# Altium PCB PCB1.pcbdoc (part 3 of 3)
Units mil, origin at the board's own origin, x right, y up, seen from the top; angles counter-clockwise.
Board outline 4471.89 x 4515.94 mil, 4 copper layers (Top Layer, Inner1, Inner2, Bottom Layer); 115 components, 147 nets, 637 pads, 517 vias.
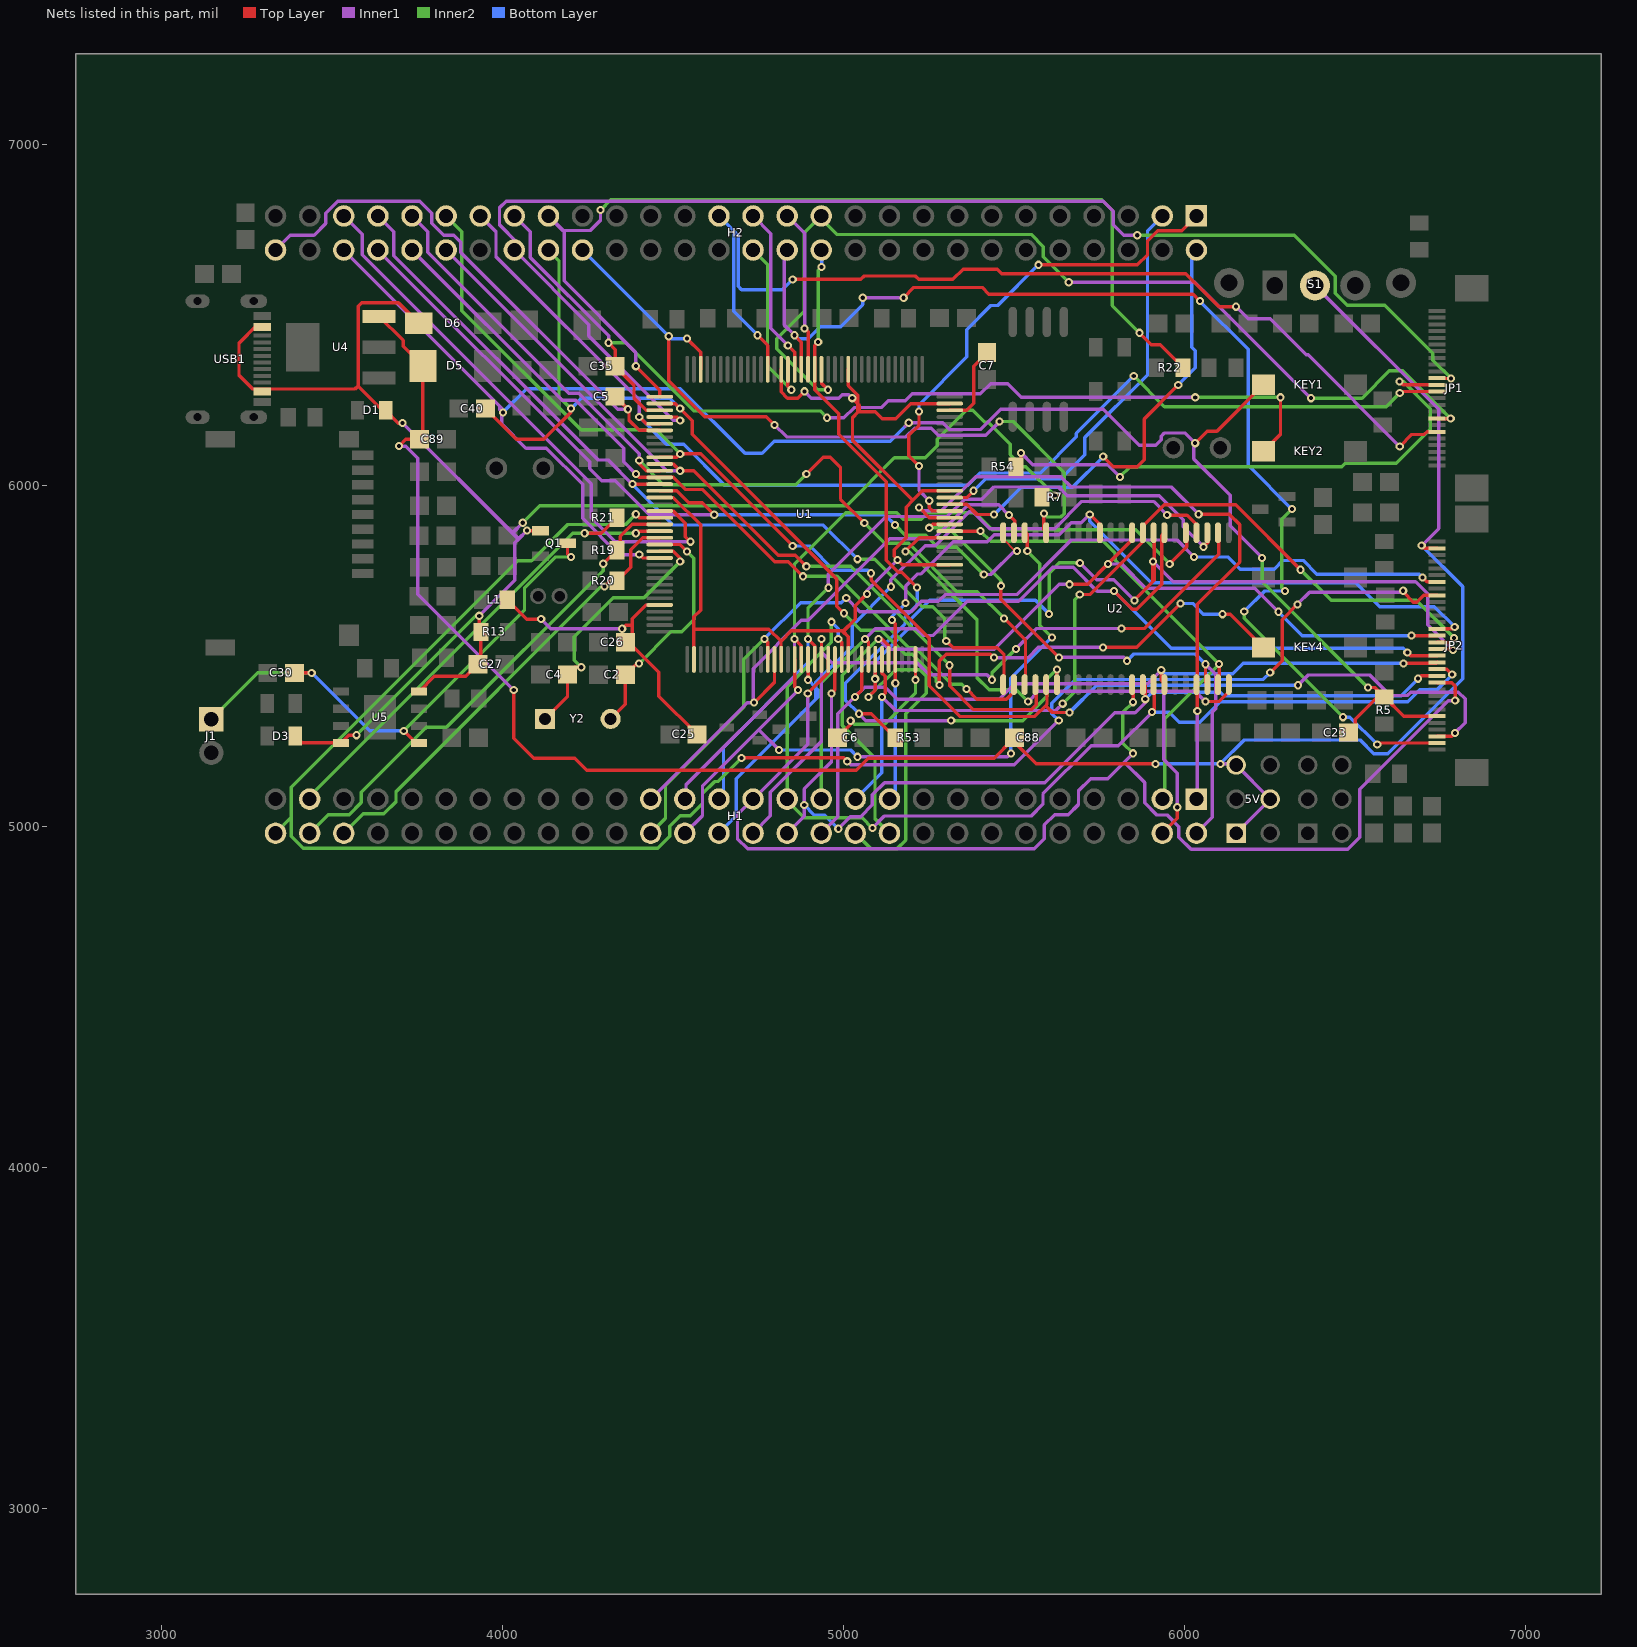
[diagram p5: the nets of this part, all layers, seen from the top]

## Via types
v1: diameter 24.02, hole 12.01, Top Layer to Bottom Layer, 515 vias
v2: diameter 19.68, hole 11.81, Top Layer to Bottom Layer, 2 vias

## Nets (pads, with @x,y where several pads share a name; then routed paths per layer and width w, separated by ;. In a path a pad name is that pad's centre, name@x,y a point inside that pad or via, vN(x,y) a via of type N, cw(c..) or ccw(c..) an arc to the next point about the centre after c; other vN are vias at no path point) (continued)
PE1: H2.38 U1.142 U2.40 | length 2223
  Top Layer w9.92: v1(4488.22,6438.16) 4488.22,6308.16 4594.28,6202.09 4774.28,6202.09 v1(4798.22,6178.16) ; v1(4541.77,6431.14) 4581.77,6391.14 U1.142@4581.77,6341.14 ; v1(5588.22,5918.16) 5588.22,5872.56 U2.40@5597.17,5863.6
  Inner1 w9.92: v1(4798.22,6178.16) 4833.57,6142.81 5183.57,6142.81 5208.93,6168.16 5258.22,6168.16 5278.22,6148.16 5418.22,6148.16 v1(5458.22,6188.16)
  Inner2 w9.92: v1(5458.22,6188.16) 5498.22,6188.16 5648.22,6038.16 5648.22,5918.16 5638.22,5908.16 5598.22,5908.16 v1(5588.22,5918.16)
  Bottom Layer w9.92: H2.38@4235.43,6690.94 4495.23,6431.14 v1(4541.77,6431.14)
PE2: H2.39 R22.2 U1.1 | length 2906.5
  Top Layer w9.92: v1(4391.69,6350.43) 4461.69,6280.43 U1.1@4461.69,6260.43 ; v1(5868.18,6448.2) 5903.54,6412.84 5929.37,6412.84 R22.2@5996.26,6345.94
  Inner1 w9.92: H2.39@4135.43,6790.94 4178.18,6748.2 ; v1(4288.18,6808.2) 4288.18,6778.2 4258.18,6748.2 4178.18,6748.2 ; v1(4391.69,6350.43) 4391.69,6390.43 4181.69,6600.43 4181.69,6744.69 4178.18,6748.2
  Inner2 w9.92: v1(4288.18,6808.2) 4318.18,6838.2 5758.18,6838.2 5788.18,6808.2 5788.18,6528.2 v1(5868.18,6448.2)
PE3: C40.2 H2.40 KEY4.1 U1.2 | length 3557.5
  Top Layer w9.92: C40.2@3951.26,6225.94 4041.26,6135.94 4121.69,6135.94 4201.69,6215.94 v1(4201.69,6225.94) ; U1.2@4461.69,6240.74 4506.89,6240.74 v1(4521.69,6225.94) 4557.05,6190.59 4557.05,6150.59 4981.31,5726.33 4981.31,5646.33 v1(5001.69,5625.94) ; v1(5281.69,5415.94) 5281.69,5485.94 5301.69,5505.94 5431.69,5505.94 v1(5441.69,5495.94) ; v1(5761.69,5525.94) 5860.48,5525.94 v1(5989.12,5654.58) ; v1(6111.69,5623.19) 6134.57,5623.19 KEY4.1@6231.82,5525.94
  Inner1 w9.92: v1(5441.69,5495.94) 5541.69,5495.94 5571.69,5525.94 v1(5761.69,5525.94)
  Inner2 w9.92: v1(5001.69,5625.94) 5051.69,5575.94 5111.69,5575.94 5181.69,5505.94 5201.69,5505.94 5272.4,5435.23 5272.4,5425.23 v1(5281.69,5415.94)
  Inner2 w10: H2.40@4135.43,6690.94 4166.34,6660.04 4166.34,6261.3 v1(4201.69,6225.94)
  Bottom Layer w9.92: v1(4201.69,6225.94) 4231.69,6255.94 4491.69,6255.94 v1(4521.69,6225.94) ; v1(5989.12,5654.58) 6024.6,5654.58 6055.99,5623.19 v1(6111.69,5623.19)
PE4: C35.2 H2.41 KEY2.1 U1.3 | length 3069.6
  Top Layer w9.92: C35.2@4330.76,6350.28 4331.96,6349.08 4386.34,6294.71 4386.34,6256.42 4421.69,6221.06 U1.3@4461.69,6221.06 ; KEY2.1@6231.82,6100.94 6281.96,6151.09 v1(6281.96,6259.08)
  Top Layer w10: v1(4311.96,6419.08) 4331.96,6399.08 C35.2@4331.96,6349.08
  Inner1 w9.92: v1(4951.96,6199.08) 5001.96,6199.08 5031.96,6229.08 5111.96,6229.08 5131.96,6249.08 5181.96,6249.08 5201.96,6269.08 5401.96,6269.08 5431.96,6299.08 5481.96,6299.08 5521.96,6259.08 v1(6031.96,6259.08)
  Inner1 w10: H2.41@4035.43,6790.94 4081.96,6744.41 4081.96,6669.08 4311.96,6439.08 v1(4311.96,6419.08)
  Inner2 w9.92: v1(4311.96,6419.08) 4361.96,6419.08 4561.96,6219.08 4931.96,6219.08 v1(4951.96,6199.08) ; v1(6031.96,6259.08) v1(6281.96,6259.08)
PE5: H2.42 JP1.14 U1.4 | length 4046.9
  Top Layer w9.92: U1.4@4461.69,6201.37 4511.69,6201.37 v1(4521.69,6191.37) ; JP1.14@6741.2,6315.47 6742.27,6314.4 v1(6781.98,6314.4)
  Inner1 w9.92: H2.42@4035.43,6690.94 H2.42@4041.98,6684.4 ; v1(4521.69,6191.37) 4501.69,6191.37 4254.2,6438.86 4254.2,6472.18 H2.42@4041.98,6684.4 ; v1(5861.98,6734.4) 5821.98,6734.4 5791.98,6764.4 5791.98,6804.4 5761.98,6834.4 4011.98,6834.4 3991.98,6814.4 3991.98,6764.4 4041.98,6714.4 H2.42@4041.98,6684.4
  Inner2 w9.92: v1(5861.98,6734.4) 6321.98,6734.4 6441.98,6614.4 6441.98,6564.4 6477.34,6529.04 6587.34,6529.04 6728.76,6387.62 6728.76,6367.62 v1(6781.98,6314.4)
PE6: H2.43 JP1.12 U1.5 | length 3467.1
  Top Layer w9.92: v1(4401.69,6201.69) 4421.69,6181.69 U1.5@4461.69,6181.69 ; v1(6631.69,6271.69) 6636.1,6276.1 JP1.12@6741.2,6276.1
  Inner1 w9.92: H2.43@3935.43,6790.94 3981.69,6744.69 3981.69,6671.69 4401.69,6251.69 v1(4401.69,6201.69)
  Inner2 w9.92: v1(5851.69,6321.69) 5941.69,6231.69 6591.69,6231.69 v1(6631.69,6271.69)
  Bottom Layer w9.92: v1(4401.69,6201.69) 4481.69,6121.69 4531.69,6121.69 4651.69,6001.69 5364.75,6001.69 5400.1,6037.05 5577.05,6037.05 5683.11,6143.12 5683.11,6153.12 v1(5851.69,6321.69)
PE7: H1.27 JP2.11 U1.58 U2.13 | length 3690.1
  Top Layer w9.92: v1(4895.79,5390.74) 4955.79,5450.74 U1.58@4955.79,5490.74 ; U2.13@5849.13,5418.28 5849.69,5417.72 v1(5849.69,5365.2)
  Top Layer w10: JP2.11@6741.2,5422.68 6784.16,5422.68 6794.16,5412.68 v1(6794.16,5369.67)
  Inner1 w9.92: v1(4895.79,5390.74) 4895.79,5241.3 H1.27@4735.43,5080.94 4689.69,5035.2 4689.69,4965.2 4719.69,4935.2 5559.69,4935.2 5589.69,4965.2 5589.69,5005.2 5619.69,5035.2 5659.69,5035.2 5689.69,5065.2 5689.69,5105.2 5725.05,5140.56 5775.05,5140.56 5824.16,5189.67 v1(5849.69,5215.2)
  Inner1 w10: 5824.16,5189.67 5884.16,5129.67 5884.16,5069.67 5919.51,5034.31 5949.51,5034.31 5984.16,4999.67 5984.16,4969.67 6019.51,4934.31 6478.8,4934.31 6514.16,4969.67 6514.16,5109.67 6774.16,5369.67 v1(6794.16,5369.67)
  Inner2 w9.92: v1(5849.69,5215.2) 5819.69,5245.2 5819.69,5335.2 v1(5849.69,5365.2)
PE8: H1.26 JP2.12 U1.59 U2.14 | length 2716.2
  Top Layer w9.92: v1(4965.47,5390.74) 4975.47,5400.74 U1.59@4975.47,5490.74 ; U2.14@5880.63,5418.28 5885.47,5413.44 v1(5885.47,5374.01)
  Top Layer w10: v1(6685.47,5434.01) 6693.82,5442.36 JP2.12@6741.2,5442.36
  Inner1 w9.92: H1.26@4835.43,4980.94 4885.47,5030.98 v1(4885.47,5064.01) 4885.47,5110.74 4965.47,5190.74 v1(4965.47,5390.74) ; v1(4985.47,4994.01) 5020.83,5029.36 5050.83,5029.36 5085.47,5064.01 5085.47,5094.01 5120.83,5129.36 5590.83,5129.36 5795.47,5334.01 5855.47,5334.01 5885.47,5364.01 v1(5885.47,5374.01)
  Bottom Layer w9.92: v1(4885.47,5064.01) 4915.47,5034.01 4945.47,5034.01 v1(4985.47,4994.01)
  Bottom Layer w10: v1(5885.47,5374.01) 5905.47,5394.01 6105.47,5394.01 6115.47,5384.01 6635.47,5384.01 v1(6685.47,5434.01)
PE9: H1.25 JP2.13 U1.60 U2.15 | length 3048.6
  Top Layer w9.92: v1(4985.16,5550.74) 4995.16,5540.74 U1.60@4995.16,5490.74 ; v1(5905.43,5336.09) 5912.13,5342.78 U2.15@5912.13,5418.28
  Top Layer w10: JP2.13@6741.2,5462.05 6769.47,5462.05 v1(6785.43,5446.09)
  Inner1 w9.92: v1(5085.43,4996.09) 5120.79,5031.44 5550.79,5031.44 5585.43,5066.09 5585.43,5096.09 5726.86,5237.51 5806.86,5237.51 v1(5905.43,5336.09)
  Inner2 w9.92: v1(4965.16,5600.74) 4965.16,5540.74 4835.43,5411.02 H1.25@4835.43,5080.94 4835.43,5076.09 4885.43,5026.09 5055.43,5026.09 v1(5085.43,4996.09)
  Bottom Layer w9.92: v1(4965.16,5600.74) 4985.16,5580.74 v1(4985.16,5550.74)
  Bottom Layer w10: v1(5905.43,5336.09) 5955.43,5336.09 5985.43,5306.09 6045.43,5306.09 6105.43,5366.09 6655.43,5366.09 6690.79,5401.44 6740.79,5401.44 v1(6785.43,5446.09)
PE10: H1.24 JP2.14 U1.63 U2.16 | length 2390.7
  Top Layer w9.92: v1(5034.21,5380.74) 5054.21,5400.74 U1.63@5054.21,5490.74 ; v1(5932.46,5458.99) 5932.46,5429.45 U2.16@5943.62,5418.28
  Top Layer w10: v1(6642.46,5478.99) 6738.46,5478.99 JP2.14@6741.2,5481.73
  Inner1 w9.92: H1.24@4935.43,4980.94 4984.21,5029.72 4984.21,5330.74 v1(5034.21,5380.74) 5062.46,5408.99 5122.46,5408.99 5157.81,5373.64 5457.81,5373.64 5503.17,5418.99 5892.46,5418.99 v1(5932.46,5458.99)
  Bottom Layer w10: v1(5932.46,5458.99) 5942.46,5448.99 6142.46,5448.99 6172.46,5478.99 v1(6642.46,5478.99)
PE11: H1.23 JP2.15 U1.64 U2.29 | length 2824.4
  Top Layer w9.92: v1(5063.9,5550.74) 5073.9,5540.74 U1.64@5073.9,5490.74 ; v1(5793.9,5690.74) 5846.83,5637.82 5860.97,5637.82 5933.9,5710.74 5933.9,5853.88 U2.29@5943.62,5863.6
  Top Layer w10: v1(6653.9,5510.74) 6663.23,5501.42 JP2.15@6741.2,5501.42
  Inner1 w9.92: v1(5063.9,5550.74) 5093.9,5580.74 5213.9,5580.74 5233.9,5560.74 5263.9,5560.74 5363.9,5660.74 5513.9,5660.74 5613.9,5760.74 5673.9,5760.74 5743.9,5690.74 v1(5793.9,5690.74)
  Inner2 w9.92: H1.23@4935.43,5080.94 4935.43,5422.28 v1(5063.9,5550.74)
  Bottom Layer w10: v1(5793.9,5690.74) 5961.69,5522.95 6641.69,5522.95 v1(6653.9,5510.74)
PE12: H1.22 JP2.16 U1.65 U2.30 | length 3476
  Top Layer w9.92: v1(5073.58,5380.74) 5093.58,5400.74 v1(5093.58,5433.7) U1.65@5093.58,5490.74 ; v1(5853.58,5663.7) 5907.95,5718.07 5912.13,5722.25 U2.30@5912.13,5863.6
  Top Layer w10: 5907.95,5718.07 v1(5907.95,5778.07) ; JP2.16@6741.2,5521.1 6784.92,5521.1 v1(6787.95,5518.07)
  Inner1 w9.92: v1(5693.58,5773.7) 5743.58,5723.7 5793.58,5723.7 v1(5853.58,5663.7)
  Inner1 w10: v1(5907.95,5778.07) 5967.95,5718.07 6677.95,5718.07 6713.31,5682.71 6713.31,5592.71 v1(6787.95,5518.07)
  Inner2 w9.92: H1.22@5035.43,4980.94 5081.7,4934.68 5157.32,4934.68 5183.58,4960.94 5183.58,5330.74 5243.58,5390.74 5243.58,5440.74 5223.58,5460.74 5153.58,5460.74 v1(5073.58,5380.74) ; v1(5603.58,5623.7) 5603.58,5743.7 5633.58,5773.7 v1(5693.58,5773.7)
  Bottom Layer w9.92: v1(5093.58,5433.7) 5093.58,5483.7 5199.65,5589.76 5199.65,5609.76 5253.58,5663.7 5563.58,5663.7 v1(5603.58,5623.7)
PE13: H1.21 JP2.17 U1.66 U2.31 | length 2795.1
  Top Layer w9.92: v1(5113.27,5380.74) 5123.27,5390.74 5123.27,5440.74 5113.27,5450.74 U1.66@5113.27,5490.74 ; v1(5693.27,5680.74) 5723.27,5680.74 5880.63,5838.1 U2.31@5880.63,5863.6
  Top Layer w10: U2.31@5880.63,5863.6 5880.63,5883.6 5940.63,5943.6 6150.63,5943.6 v1(6340.63,5753.6) ; JP2.17@6741.2,5540.79 6777.82,5540.79 v1(6790.63,5553.6)
  Inner1 w9.92: v1(5113.27,5380.74) 5153.27,5340.74 5623.27,5340.74 v1(5643.27,5360.74)
  Inner2 w9.92: v1(5643.27,5360.74) 5678.63,5396.1 5678.63,5666.1 v1(5693.27,5680.74)
  Inner2 w10: v1(6340.63,5753.6) 6430.63,5663.6 6680.63,5663.6 v1(6790.63,5553.6)
  Bottom Layer w9.92: H1.21@5035.43,5080.94 5113.27,5158.78 v1(5113.27,5380.74)
PE14: H1.20 JP2.18 U1.67 U2.32 | length 2713.9
  Top Layer w9.92: v1(5102.95,5550.74) 5112.95,5550.74 5132.95,5530.74 U1.67@5132.95,5490.74 ; v1(5662.95,5710.74) 5716.27,5710.74 v1(5775.9,5770.38) 5849.13,5843.6 U2.32@5849.13,5863.6
  Top Layer w10: v1(6665.9,5560.38) JP2.18@6741.11,5560.38
  Inner1 w9.92: v1(5102.95,5550.74) 5132.95,5520.74 5442.95,5520.74 5632.95,5710.74 v1(5662.95,5710.74)
  Inner1 w10: v1(5775.9,5770.38) 5815.9,5770.38 5886.61,5699.67 6206.61,5699.67 v1(6275.9,5630.38)
  Inner2 w9.92: v1(5102.95,5550.74) 4996.89,5444.68 4996.89,5296.81 5092.95,5200.74 5092.95,5023.43 H1.20@5135.43,4980.94
  Bottom Layer w10: v1(6275.9,5630.38) 6345.9,5560.38 v1(6665.9,5560.38)
PE15: H1.19 JP2.19 U1.68 U2.35 | length 2617.3
  Top Layer w9.92: v1(5142.64,5605.78) 5152.64,5595.78 U1.68@5152.64,5490.74 v1(5152.64,5420.74) ; v1(5722.64,5915.78) 5754.65,5883.77 U2.35@5754.65,5863.6
  Top Layer w10: JP2.19@6741.2,5580.16 6787.02,5580.16 v1(6792.64,5585.78)
  Inner1 w9.92: v1(5182.64,5655.78) 5182.64,5705.78 5218,5741.14 5228,5741.14 5322.64,5835.78 5422.64,5835.78 5442.64,5855.78 5632.64,5855.78 5668,5891.14 5698,5891.14 v1(5722.64,5915.78)
  Bottom Layer w9.92: H1.19@5135.43,5080.94 5152.64,5098.15 v1(5152.64,5420.74) ; v1(5142.64,5605.78) 5142.64,5615.78 v1(5182.64,5655.78)
  Bottom Layer w10: v1(5722.64,5915.78) 5722.64,5895.78 5902.64,5715.78 6502.64,5715.78 6573.35,5645.07 6733.35,5645.07 v1(6792.64,5585.78)
PF0: H2.45 JP2.3 U1.10 U2.5 | length 4226.9
  Top Layer w9.92: U1.10@4461.69,6083.26 4511.69,6083.26 v1(4521.69,6093.26) 4581.69,6093.26 v1(4851.69,5823.26) ; v1(5081.69,5743.26) 5081.69,5723.26 5251.69,5553.26 5251.69,5413.26 5341.69,5323.26 5561.69,5323.26 5593.26,5354.84 5597.17,5358.74 U2.5@5597.17,5418.28
  Top Layer w10: 5593.26,5354.84 5613.26,5334.84 v1(5663.26,5334.84) ; JP2.3@6741.2,5265.2 6783.63,5265.2 v1(6793.26,5274.84)
  Inner1 w10: v1(6333.26,5414.84) 6363.26,5444.84 6543.26,5444.84 6603.26,5384.84 6653.26,5384.84 6663.26,5394.84 6803.26,5394.84 6823.26,5374.84 6823.26,5304.84 v1(6793.26,5274.84)
  Inner2 w9.92: H2.45@3835.43,6790.94 3881.69,6744.69 3881.69,6513.26 4230.98,6163.98 4450.98,6163.98 v1(4521.69,6093.26)
  Bottom Layer w9.92: v1(4851.69,5823.26) 4901.69,5823.26 4972.4,5752.55 5072.4,5752.55 v1(5081.69,5743.26)
  Bottom Layer w10: v1(5663.26,5334.84) 5743.26,5414.84 v1(6333.26,5414.84)
PF1: H2.46 U1.11 U2.4 | length 2458.3
  Top Layer w9.92: U1.11@4461.69,6063.58 4501.69,6063.58 v1(4521.69,6043.58) 4561.69,6043.58 4809.18,5796.1 4859.18,5796.1 v1(4891.69,5763.58) ; v1(5311.69,5473.58) 5311.69,5413.58 5381.69,5343.58 5551.69,5343.58 5565.67,5357.56 U2.4@5565.67,5418.28
  Inner1 w9.92: H2.46@3835.43,6690.94 4482.79,6043.58 v1(4521.69,6043.58)
  Inner2 w9.92: v1(4891.69,5763.58) 5021.69,5763.58 v1(5311.69,5473.58)
PF2: H2.47 U1.12 U2.3 | length 2690.5
  Top Layer w9.92: v1(4401.69,6073.89) 4401.69,6063.89 4421.69,6043.89 U1.12@4461.69,6043.89 ; v1(4891.69,6033.89) 4941.69,6083.89 4961.69,6083.89 4991.69,6053.89 4991.69,5960.76 v1(5061.69,5890.76) ; v1(5471.69,5610.76) 5534.17,5548.28 U2.3@5534.17,5418.28
  Inner1 w9.92: H2.47@3735.43,6790.94 3781.69,6744.69 3781.69,6683.89 4194.91,6270.67 4224.91,6270.67 4401.69,6093.89 v1(4401.69,6073.89)
  Inner2 w9.92: v1(4401.69,6073.89) 4472.4,6003.18 4860.98,6003.18 v1(4891.69,6033.89) ; v1(5061.69,5890.76) 5121.69,5830.76 5191.69,5830.76 5333.11,5689.34 5393.11,5689.34 v1(5471.69,5610.76)
PF3: H2.48 U1.13 U2.2 | length 2366.1
  Top Layer w9.92: v1(4392.16,6034.21) 4402.16,6024.21 U1.13@4461.69,6024.21 4501.69,6024.21 4537.05,5988.86 4587.05,5988.86 4799.18,5776.73 4839.18,5776.73 v1(4881.69,5734.21) ; v1(5361.69,5404.21) 5391.69,5374.21 5478.61,5374.21 5502.68,5398.28 U2.2@5502.68,5418.28
  Inner1 w9.92: H2.48@3735.43,6690.94 4175.39,6250.99 4215.39,6250.99 4356.81,6109.57 4356.81,6069.57 v1(4392.16,6034.21)
  Inner2 w9.92: v1(4881.69,5734.21) 4981.69,5734.21 5191.69,5524.21 5211.69,5524.21 5317.76,5418.15 5347.76,5418.15 v1(5361.69,5404.21)
PF4: H2.49 U1.14 U2.1 | length 2611.2
  Top Layer w9.92: v1(4381.85,6004.52) U1.14@4461.69,6004.52 ; v1(5301.85,5544.52) 5321.85,5524.52 5451.85,5524.52 5471.18,5505.2 U2.1@5471.18,5418.28
  Inner1 w9.92: H2.49@3635.43,6790.94 3681.85,6744.52 3681.85,6674.52 4281.14,6075.24 4311.14,6075.24 v1(4381.85,6004.52)
  Inner2 w9.92: v1(5041.85,5784.52) 5091.85,5784.52 5231.85,5644.52 5261.85,5644.52 5297.21,5609.17 5297.21,5549.17 v1(5301.85,5544.52)
  Bottom Layer w9.92: v1(4381.85,6004.52) 4501.85,5884.52 4941.85,5884.52 v1(5041.85,5784.52)
PF5: H2.50 U1.15 U2.44 | length 2570.7
  Top Layer w5.91: U2.44@5468.9,5862.07 5468.9,5844.13 5504.84,5808.19 v1(5509.56,5808.19)
  Top Layer w9.92: U1.15@4461.69,5984.84 4511.69,5984.84 4547.05,5949.49 4587.05,5949.49 v1(4621.69,5914.84)
  Inner1 w9.92: H2.50@3635.43,6690.94 4256.34,6070.04 4256.34,6050.2 4291.69,6014.84 4331.69,6014.84 4431.69,5914.84 v1(4621.69,5914.84) ; v1(5412.15,5739.56) 5432.34,5739.56 5500.97,5808.19 v1(5509.56,5808.19)
  Inner2 w9.92: v1(5151.69,5884.84) 5181.69,5854.84 5241.69,5854.84 5277.05,5819.49 5332.23,5819.49 v1(5412.15,5739.56)
  Bottom Layer w9.92: v1(4621.69,5914.84) 5121.69,5914.84 v1(5151.69,5884.84)
PF6: H2.51 U1.18 | length 1655.7
  Top Layer w9.92: U1.18@4461.69,5925.78 4501.69,5925.78 4537.05,5890.43 4537.05,5850.43 v1(4551.69,5835.78)
  Inner1 w9.92: H2.51@3535.43,6790.94 3589.23,6737.15 3589.23,6676.72 4260.98,6004.97 4260.98,5906.5 4331.69,5835.78 v1(4551.69,5835.78)
PF7: H1.56 JP2.24 U1.19 | length 5515.8
  Top Layer w9.92: v1(4391.69,5916.1) 4401.69,5906.1 U1.19@4461.69,5906.1 ; v1(4701.69,5201.77) 5001.69,5201.77 v1(5011.69,5191.77) ; v1(6251.69,5451.77) 6287.05,5487.13 6287.05,5607.13 v1(6331.69,5651.77) ; v1(6641.69,5691.77) 6641.69,5688.58 6671.69,5658.58 6681.69,5658.58 6701.69,5678.58 JP2.24@6741.2,5678.58
  Inner1 w9.92: v1(5011.69,5191.77) 5021.69,5181.77 5501.69,5181.77 v1(5631.69,5311.77) ; v1(6331.69,5651.77) 6367.05,5687.13 6637.05,5687.13 v1(6641.69,5691.77)
  Inner2 w9.92: H1.56@3335.43,4980.94 3381.69,5027.2 ; v1(4391.69,5916.1) 4361.69,5886.1 4191.97,5886.1 4085.91,5780.04 4045.62,5780.04 3381.69,5116.1 3381.69,5027.2 ; v1(4701.69,5201.77) 4632.4,5132.48 4622.4,5132.48 4587.05,5097.13 4587.05,5067.13 4551.69,5031.77 4521.69,5031.77 4491.69,5001.77 4491.69,4971.77 4456.34,4936.42 3417.05,4936.42 3381.69,4971.77 3381.69,5027.2
  Bottom Layer w9.92: v1(5631.69,5311.77) 5611.69,5331.77 5611.69,5361.77 5681.69,5431.77 6231.69,5431.77 v1(6251.69,5451.77)
PF8: H1.54 R19.2 U1.20 | length 1448.2
  Top Layer w9.92: R19.2@4336.26,5810.94 4346.38,5821.06 4346.38,5851.06 4381.73,5886.41 U1.20@4461.69,5886.41
  Top Layer w10: v1(4296.26,5770.94) R19.2@4336.26,5810.94
  Inner2 w10: H1.54@3435.43,4980.94 3490.08,5035.59 3550.91,5035.59 3586.26,5070.94 3586.26,5100.94 3776.64,5291.33 3836.64,5291.33 4296.26,5750.94 v1(4296.26,5770.94)
PF9: H1.53 R21.2 U1.21 | length 1469.7
  Top Layer w9.92: v1(4241.69,5860.51) 4290.83,5860.51 R21.2@4336.26,5905.94 ; v1(4391.69,5860.51) 4397.91,5866.73 U1.21@4461.69,5866.73
  Inner2 w9.92: v1@4242.87,5860.51 v1(4391.69,5860.51)
  Inner2 w10: H1.53@3435.43,5080.94 3435.43,5088.74 4207.21,5860.51 v1(4241.69,5860.51) v1@4242.87,5860.51
PF10: H1.52 R20.2 U1.22 | length 1336.8
  Top Layer w9.92: R20.2@4336.26,5720.94 4339.5,5724.19 4376.34,5761.02 4376.34,5811.69 4411.69,5847.04 U1.22@4461.69,5847.04
  Top Layer w10: v1(4299.5,5704.19) 4319.5,5724.19 R20.2@4339.5,5724.19
  Inner2 w10: H1.52@3535.43,4980.94 3592.28,5037.79 3653.11,5037.79 3688.46,5073.15 3688.46,5103.15 4289.5,5704.19 v1(4299.5,5704.19)
PF11: H1.34 JP2.26 U1.49 | length 2969.7
  Top Layer w9.92: v1(4768.62,5550.74) 4778.62,5540.74 U1.49@4778.62,5490.74 ; v1(6698.62,5730.74) 6711.42,5717.95 JP2.26@6741.2,5717.95
  Inner1 w9.92: v1(5008.62,5670.74) 5048.62,5630.74 5198.62,5630.74 5228.62,5660.74 5278.62,5660.74 5298.62,5680.74 5508.62,5680.74 5668.62,5840.74 5978.62,5840.74 v1(6028.62,5790.74)
  Inner2 w9.92: H1.34@4435.43,4980.94 4478.62,5024.13 4478.62,5120.74 4708.62,5350.74 4708.62,5490.74 v1(4768.62,5550.74)
  Bottom Layer w9.92: v1(4768.62,5550.74) 4874.69,5656.81 4994.69,5656.81 v1(5008.62,5670.74) ; v1(6028.62,5790.74) 6128.62,5790.74 6163.98,5755.39 6263.98,5755.39 6289.33,5780.74 6348.62,5780.74 6388.62,5740.74 6688.62,5740.74 v1(6698.62,5730.74)
PF12: H1.33 U1.50 U2.43 | length 1690.3
  Top Layer w9.92: v1(4738.31,5363.82) 4798.31,5423.82 U1.50@4798.31,5490.74 ; v1(5485.83,5913.82) 5502.68,5896.97 U2.43@5502.68,5863.6
  Inner1 w9.92: H1.33@4435.43,5080.94 4718.31,5363.82 v1@4735.83,5363.82 ; v1(4738.31,5363.82) v1@4735.83,5363.82 ; v1(5485.83,5913.82) 5455.83,5943.82 5365.83,5943.82 5265.83,5843.82 5135.83,5843.82 4897.25,5605.24 4877.25,5605.24 4735.83,5463.82 v1@4735.83,5363.82
PF13: H1.32 U1.53 U2.42 | length 2159.1
  Top Layer w9.92: U1.53@4857.36,5490.74 4857.36,5410.74 v1(4867.36,5400.74) ; U2.42@5534.17,5863.6 5539.57,5858.21 v1(5539.57,5808.19)
  Inner1 w9.92: H1.32@4535.43,4980.94 4587.36,5032.87 4587.36,5120.74 4751.6,5284.99 ; v1(4811.6,5224.99) 4751.6,5284.99 ; v1(4867.36,5400.74) 4751.6,5284.99 ; v1(5041.6,5204.99) 5481.6,5204.99 v1(5491.6,5214.99)
  Inner2 w9.92: v1(5539.57,5808.19) 5576.25,5771.51 5576.25,5590.34 v1(5611.6,5554.99)
  Bottom Layer w9.92: v1(4811.6,5224.99) 5021.6,5224.99 v1(5041.6,5204.99) ; v1(5491.6,5214.99) 5491.6,5434.99 v1(5611.6,5554.99)
PF14: H1.31 U1.54 U2.27 | length 2245.5
  Top Layer w9.92: v1(4857.05,5550.74) 4877.05,5530.74 U1.54@4877.05,5490.74 ; v1(5957.05,5770.74) 6006.61,5820.3 U2.27@6006.61,5863.6
  Inner1 w9.92: H1.31@4535.43,5080.94 4538.85,5084.36 4538.85,5122.55 4857.05,5440.74 v1(4857.05,5550.74)
  Inner2 w9.92: v1(4857.05,5550.74) 4857.05,5770.74 5007.05,5920.74 5157.05,5920.74 5177.05,5900.74 5227.05,5900.74 5247.05,5920.74 5387.05,5920.74 5437.05,5870.74 5857.05,5870.74 v1(5957.05,5770.74)
PF15: H1.30 U1.55 U2.26 | length 2168.1
  Top Layer w9.92: v1(4896.73,5430.74) U1.55@4896.73,5490.74 ; v1(5949.72,5913.73) 6007.99,5913.73 6038.11,5883.6 U2.26@6038.11,5863.6
  Inner1 w9.92: v1(5139.72,5703.73) 5139.72,5723.73 5239.72,5823.73 5269.72,5823.73 5369.72,5923.73 5379.72,5923.73 5429.72,5873.73 5619.72,5873.73 5699.72,5953.73 5909.72,5953.73 v1(5949.72,5913.73)
  Bottom Layer w9.92: H1.30@4635.43,4980.94 4686.73,5032.24 4686.73,5140.74 4919.72,5373.73 ; v1(4896.73,5430.74) 4919.72,5407.76 ; v1(5139.72,5703.73) 5025.78,5589.8 5025.78,5529.8 4919.72,5423.73 4919.72,5407.76 ; 4919.72,5373.73 4919.72,5407.76 ; 4919.72,5373.73 4926.73,5380.74 4926.73,5400.74 4919.72,5407.76
PG0: H1.29 U1.56 U2.25 | length 2199.5
  Top Layer w9.92: v1(4896.42,5550.74) 4916.42,5530.74 U1.56@4916.42,5490.74 ; v1(6056.42,5820.74) 6069.61,5833.93 U2.25@6069.61,5863.6
  Inner1 w9.92: v1(4956.42,5700.74) 4956.42,5740.74 5125.41,5909.73 5305.41,5909.73 5356.42,5960.74 5406.42,5960.74 5441.78,5996.1 5631.07,5996.1 5656.42,5970.74 5926.42,5970.74 5997.13,5900.03 5997.13,5880.03 v1(6056.42,5820.74)
  Inner2 w9.92: v1(4896.42,5550.74) 4896.42,5640.74 v1(4956.42,5700.74)
  Bottom Layer w9.92: H1.29@4635.43,5080.94 4648.93,5094.44 4648.93,5233.26 4896.42,5480.74 v1(4896.42,5550.74)
PG1: H1.28 U1.57 U2.24 | length 2139.8
  Top Layer w9.92: U1.57@4936.1,5490.74 v1(4936.1,5550.74) ; v1(5816.1,5581.06) 5883.14,5581.06 6101.1,5799.02 U2.24@6101.1,5863.6
  Inner1 w9.92: H1.28@4735.43,4980.94 4786.1,5031.61 4786.1,5100.74 4936.1,5250.74 4936.1,5511.06 ; v1(4936.1,5550.74) 4936.1,5511.06 ; v1(5436.1,5431.06) 5421.46,5445.7 5251.46,5445.7 5216.1,5481.06 4966.1,5481.06 4936.1,5511.06 ; v1(5506.1,5521.06) 5566.1,5581.06 v1(5816.1,5581.06)
  Inner2 w9.92: v1(5436.1,5431.06) 5436.1,5451.06 v1(5506.1,5521.06)
PG2: H1.4 U1.87 U2.22 | length 1887.5
  Top Layer w9.92: v1(5182.09,5807.04) 5222.09,5847.04 U1.87@5312.09,5847.04 ; v1(6062.09,5367.04) 6101.36,5367.04 6132.6,5398.28 U2.22@6132.6,5418.28
  Top Layer w10: H1.4@5935.43,4980.94 5979.19,5024.7 v1(5979.19,5057.04)
  Inner1 w9.92: v1(5542.09,5367.04) 5572.09,5397.04 5939.19,5397.04 6032.09,5397.04 v1(6062.09,5367.04)
  Inner1 w10: 5939.19,5397.04 5939.19,5197.04 5979.19,5157.04 v1(5979.19,5057.04)
  Inner2 w9.92: v1(5182.09,5807.04) 5192.09,5807.04 5392.09,5607.04 5392.09,5437.04 5427.45,5401.69 5507.45,5401.69 v1(5542.09,5367.04)
PG3: H1.3 U1.88 U2.21 | length 1486.9
  Top Layer w9.92: U1.88@5312.09,5866.73 v1(5402.09,5866.73) ; U2.21@6101.1,5418.28 6102.09,5419.27 v1(6102.09,5476.73)
  Inner2 w9.92: v1(5402.09,5866.73) 5432.09,5836.73 5762.09,5836.73 5797.45,5801.38 5797.45,5781.38 v1(6102.09,5476.73)
  Inner2 w10: H1.3@5935.43,5080.94 5942.09,5087.6 5942.09,5316.73 v1(6102.09,5476.73)
PG4: H1.2 U1.89 U2.20 | length 1681.6
  Top Layer w9.92: v1(5252.09,5876.41) 5262.09,5886.41 U1.89@5312.09,5886.41 ; v1(5462.09,5706.41) 5462.09,5666.41 v1(5632.09,5496.41) ; v1(6062.09,5476.41) 6062.09,5425.8 U2.20@6069.61,5418.28
  Inner1 w9.92: v1(5632.09,5496.41) 5822.09,5496.41 v1(5832.09,5486.41)
  Inner1 w10: H1.2@6035.43,4980.94 6082.09,5027.6 6082.09,5336.41 6092.09,5346.41 6092.09,5446.41 v1(6062.09,5476.41)
  Inner2 w9.92: v1(5252.09,5876.41) 5307.76,5876.41 5462.09,5722.09 v1(5462.09,5706.41)
  Bottom Layer w9.92: v1(5832.09,5486.41) 5852.09,5506.41 6032.09,5506.41 v1(6062.09,5476.41)
PG5: H1.1 U1.90 U2.19 | length 2003.6
  Top Layer w9.92: v1(5222.09,5936.1) 5252.09,5906.1 U1.90@5312.09,5906.1 ; U2.19@6038.11,5418.97 6038.11,5652.12 6162.09,5776.1 6162.09,5886.1 6132.09,5916.1 v1(6042.09,5916.1)
  Top Layer w10: v1(6038.11,5338.97) 6038.11,5418.28 U2.19@6038.11,5418.97
  Inner1 w9.92: v1(5222.09,5936.1) 5232.09,5926.1 5287.86,5926.1 5387.86,6026.1 5637.86,6026.1 5667.86,5996.1 5962.09,5996.1 v1(6042.09,5916.1)
  Inner1 w10: H1.1@6035.43,5080.94 6038.11,5083.62 v1(6038.11,5338.97)
PG6: H2.1 U1.91 | length 1516.1
  Top Layer w9.92: v1(5222.09,6057.6) 5192.09,6087.6 5192.09,6147.6 5222.09,6177.6 v1(5222.09,6217.6) ; v1(5252.09,5955.78) 5252.09,5935.78 5262.09,5925.78 U1.91@5312.09,5925.78 ; v1(5572.09,6647.6) 5862.09,6647.6 5892.09,6677.6 5892.09,6717.6 5922.09,6747.6 5992.09,6747.6 H2.1@6035.43,6790.94
  Inner1 w9.92: v1(5222.09,6057.6) 5222.09,5985.78 v1(5252.09,5955.78)
  Bottom Layer w9.92: v1(5222.09,6217.6) 5222.09,6237.6 5362.09,6377.6 5362.09,6457.6 5432.8,6528.31 5452.8,6528.31 v1(5572.09,6647.6)
PG7: H2.2 U1.92 | length 1360.8
  Top Layer w9.92: U1.92@5312.09,5945.47 5362.09,5945.47 5392.09,5915.47 v1(5442.09,5915.47) ; v1(5762.09,6085.47) 5792.09,6055.47 5862.09,6055.47 5882.09,6075.47 5882.09,6195.47 v1(5982.09,6295.47)
  Bottom Layer w9.92: v1(5442.09,5915.47) 5522.09,5995.47 5672.09,5995.47 v1(5762.09,6085.47) ; v1(5982.09,6295.47) 6032.09,6345.47 6032.09,6395.47 6022.09,6405.47 6022.09,6677.6 H2.2@6035.43,6690.94
PG8: H2.3 U1.93 | length 1242.1
  Top Layer w9.92: U1.93@5312.09,5965.15 5362.09,5965.15 v1(5382.09,5985.15)
  Bottom Layer w9.92: v1(5382.09,5985.15) 5417.45,6020.51 5637.45,6020.51 5708.16,6091.22 5708.16,6141.22 5892.09,6325.15 5892.09,6747.6 H2.3@5935.43,6790.94
PG9: H2.23 JP1.8 U1.124 | length 2929.8
  Top Layer w9.92: U1.124@4936.1,6341.14 4936.1,6300.48 v1(4955.43,6281.14) ; JP1.8@6741.2,6197.36 6742.01,6196.55 v1(6781.04,6196.55)
  Inner1 w9.92: v1(5661.04,6596.55) 6031.04,6596.55 v1(6371.04,6256.55)
  Inner2 w9.92: H2.23@4935.43,6790.94 H2.23@4931.04,6786.55 ; v1(4955.43,6281.14) 4925.43,6281.14 4805.43,6401.14 4805.43,6431.14 4885.43,6511.14 4885.43,6740.94 H2.23@4931.04,6786.55 ; v1(5661.04,6596.55) 5586.39,6671.19 5586.39,6701.19 5551.04,6736.55 4981.04,6736.55 H2.23@4931.04,6786.55 ; v1(6371.04,6256.55) 6521.04,6256.55 6601.04,6336.55 6641.04,6336.55 v1(6781.04,6196.55)
PG10: H2.24 R53.1 U1.125 U2.6 | length 2460.8
  Top Layer w9.92: v1(4926.42,6421.14) 4916.42,6411.14 U1.125@4916.42,6341.14 4916.42,6281.14 4987.13,6210.43 4987.13,6150.43 5126.42,6011.14 5126.42,5781.14 5161.78,5745.79 5171.78,5745.79 v1(5216.42,5701.14) ; v1(5046.42,5331.14) 5082.32,5331.14 R53.1@5152.52,5260.94
  Top Layer w10: v1(5626.42,5461.14) 5626.42,5420.52 U2.6@5628.66,5418.28
  Inner1 w10: v1(5046.42,5331.14) 5066.42,5311.14 v1(5316.42,5311.14)
  Inner2 w9.92: v1(4926.42,6421.14) 4926.42,6631.14 v1(4936.42,6641.14)
  Inner2 w10: v1(5316.42,5311.14) 5526.42,5311.14 5597.13,5381.86 5597.13,5431.86 v1(5626.42,5461.14)
  Bottom Layer w9.92: H2.24@4935.43,6690.94 4936.42,6689.96 v1(4936.42,6641.14) ; v1(5046.42,5331.14) 5006.42,5371.14 5006.42,5421.14 5181.07,5595.79 5181.07,5615.79 5216.42,5651.14 v1(5216.42,5701.14)
PG11: H2.25 U1.126 | length 475.2
  Top Layer w9.92: v1(4886.73,6461.14) 4896.73,6451.14 U1.126@4896.73,6341.14
  Inner1 w9.92: H2.25@4835.43,6790.94 4886.73,6739.65 v1(4886.73,6461.14)
PG12: H2.26 JP2.2 U1.127 | length 3521
  Top Layer w9.92: v1(4857.05,6441.14) 4877.05,6421.14 U1.127@4877.05,6341.14 ; v1(5177.05,6551.14) 5207.05,6581.14 5407.05,6581.14 5427.05,6561.14 6025.57,6561.14 v1(6045.57,6541.14) ; v1(6565.57,5241.14) 6569.93,5245.51 JP2.2@6741.2,5245.51
  Inner1 w9.92: H2.26@4835.43,6690.94 4827.05,6682.56 4827.05,6471.14 v1(4857.05,6441.14) ; v1(5057.05,6551.14) v1(5177.05,6551.14)
  Inner2 w9.92: v1(6175.57,5631.14) 6175.57,5611.14 v1(6465.57,5321.14) ; v1(6295.57,5691.14) 6285.57,5701.14 6285.57,5901.14 v1(6315.57,5931.14)
  Bottom Layer w9.92: v1(4857.05,6441.14) 4867.05,6431.14 4897.05,6431.14 4932.41,6466.5 4992.41,6466.5 5057.05,6531.14 v1(5057.05,6551.14) ; v1(6045.57,6541.14) 6186.99,6399.72 6186.99,6059.72 v1(6315.57,5931.14) ; v1(6175.57,5631.14) 6235.57,5691.14 v1(6295.57,5691.14) ; v1(6465.57,5321.14) 6485.57,5321.14 v1(6565.57,5241.14)
PG13: H2.27 U1.128 | length 500.3
  Top Layer w9.92: v1(4837.36,6411.14) 4857.36,6391.14 U1.128@4857.36,6341.14
  Inner1 w9.92: H2.27@4735.43,6790.94 4787.36,6739.02 4787.36,6461.14 v1(4837.36,6411.14)
PG14: H2.28 U1.129 | length 520.4
  Top Layer w9.92: U1.129@4837.68,6341.14 4837.68,6291.14 v1(4847.68,6281.14)
  Inner2 w9.92: H2.28@4735.43,6690.94 4777.68,6648.7 4777.68,6351.14 v1(4847.68,6281.14)
PG15: H2.29 JP1.6 U1.132 | length 2997.6
  Top Layer w9.92: v1(4748.62,6441.14) 4778.62,6411.14 U1.132@4778.62,6341.14 ; v1(4851.61,6604.77) 5051.61,6604.77 5061.61,6614.77 5211.61,6614.77 5221.61,6604.77 5321.61,6604.77 5351.61,6634.77 5451.61,6634.77 5464.6,6621.78 6004.6,6621.78 6101.61,6524.77 v1(6151.61,6524.77) ; v1(6631.61,6114.77) 6666.96,6150.13 6703.74,6150.13 6711.61,6157.99 JP1.6@6741.2,6157.99
  Inner1 w9.92: v1(6151.61,6524.77) 6186.96,6489.42 6251.96,6489.42 6358.03,6383.35 6363.03,6383.35 v1(6631.61,6114.77)
  Bottom Layer w9.92: H2.29@4635.43,6790.94 4678.62,6747.76 ; v1(4748.62,6441.14) 4678.62,6511.14 4678.62,6747.76 ; v1(4851.61,6604.77) 4821.61,6574.77 4701.61,6574.77 4691.61,6584.77 4691.61,6734.77 4678.62,6747.76
PH0: C2.2 U1.23 Y2.2 | length 711.6
  Top Layer w9.92: C2.2@4361.25,5445.58 4394.17,5478.5 v1(4401.19,5478.5) ; U1.23@4461.69,5827.36 4521.69,5827.36 v1(4541.69,5807.36)
  Top Layer w10: Y2.2@4317.95,5315.94 4361.25,5359.24 C2.2@4361.25,5445.58
  Inner2 w9.92: v1(4401.19,5478.5) 4494.71,5572.01 4526.34,5572.01 4561.69,5607.36 4561.69,5787.36 v1(4541.69,5807.36)
PH1: C4.2 U1.24 Y2.1 | length 784.2
  Top Layer w9.92: C4.2@4191.26,5445.94 4212.99,5467.67 v1(4231.69,5467.67) ; U1.24@4461.69,5807.67 4501.69,5807.67 4521.69,5787.67 v1(4521.69,5777.67)
  Top Layer w10: Y2.1@4125.83,5315.94 4191.26,5381.37 C4.2@4191.26,5445.94
  Inner2 w9.92: v1(4231.69,5467.67) 4211.69,5487.67 4211.69,5557.67 4325.62,5671.61 4415.62,5671.61 v1(4521.69,5777.67)
RST: C23.2 H2.52 JP2.6 KEY1.1 R5.1 U1.25 | length 5306.7
  Top Layer w9.92: v1(4401.69,5797.99) 4411.69,5787.99 U1.25@4461.69,5787.99 ; v1(6031.83,6124.55) 6067.19,6159.9 6095.77,6159.9 KEY1.1@6231.82,6295.94
  Top Layer w10: C23.2@6481.26,5275.94 6501.24,5295.92 6501.24,5314.55 6571.95,5385.26 R5.1@6581.95,5385.26 ; v1(6538.14,5408.24) 6558.97,5408.24 R5.1@6581.95,5385.26 ; JP2.6@6741.2,5324.25 6642.96,5324.25 R5.1@6586.89,5380.31 R5.1@6581.95,5385.26
  Inner1 w9.92: H2.52@3535.43,6690.94 3991.83,6234.55 ; v1(4001.83,6214.55) v1@3998.85,6217.53 ; v1(4401.69,5797.99) 4341.69,5797.99 4235.62,5904.06 4235.62,6004.06 4129.56,6110.13 4069.56,6110.13 3998.85,6180.84 v1@3998.85,6217.53 ; 5181.83,6174.55 v1(5191.83,6184.55) 5291.83,6184.55 5311.83,6164.55 5401.83,6164.55 5461.83,6224.55 5761.83,6224.55 5867.9,6118.48 5915.77,6118.48 5931.83,6134.55 5931.83,6144.55 5941.83,6154.55 6001.83,6154.55 6028.14,6128.24 v1(6031.83,6124.55) ; 3991.83,6234.55 3991.83,6224.55 v1@3998.85,6217.53 ; 3991.83,6234.55 3998.85,6227.53 v1@3998.85,6217.53
  Inner1 w10: v1@6028.14,6128.24 6028.14,6078.24 6134.21,5972.17 6134.21,5882.17 v1(6228.14,5788.24)
  Inner2 w10: v1(6228.14,5788.24) 6228.14,5718.24 v1(6538.14,5408.24)
  Bottom Layer w9.92: v1(4001.83,6214.55) 4071.83,6284.55 4521.83,6284.55 4711.83,6094.55 4761.83,6094.55 4797.19,6129.9 5137.19,6129.9 v1(5191.83,6184.55)
V+: 5V.1 5V.3 5V.5 C88.1 C89.1 D5.1 JP2.31 S1.2 U4.3 | length 6325.6
  Top Layer w10: U4.3@3638.5,6496.49 3709.21,6425.78 3709.21,6409.14 D5.1@3767.41,6350.94 3767.41,6145.83 C89.1@3757.52,6135.94 3717.52,6135.94 v1(3697.52,6115.94) ; v1(4033.9,5400.51) 4033.9,5259.45 4092.05,5201.3 4212.17,5201.3 4247.52,5165.94 5037.52,5165.94 5072.88,5201.3 5442.88,5201.3 C88.1@5495.91,5254.33 ; C88.1@5502.52,5260.94 C88.1@5495.91,5254.33 ; v1(5915.91,5184.33) 5565.91,5184.33 C88.1@5495.91,5254.33 ; v1(6695.91,5824.33) 6703.86,5816.38 JP2.31@6741.2,5816.38
  Inner1 w10: v1(3697.52,6115.94) 3717.52,6115.94 3752.88,6080.59 3752.88,5681.53 v1(4033.9,5400.51) ; v1(6105.91,5184.33) 6148.5,5184.33 5V.5@6251.89,5080.94 5V.1@6151.89,4980.94 ; S1.2@6383.15,6586.81 6745.91,6224.05 6745.91,5874.33 v1(6695.91,5824.33)
  Inner2 w10: v1(6105.91,5184.33) 6148.5,5184.33 5V.3@6151.89,5180.94
  Bottom Layer w10: v1(5915.91,5184.33) v1(6105.91,5184.33) 6175.91,5254.33 6515.91,5254.33 6555.91,5214.33 6595.91,5214.33 6815.91,5434.33 6815.91,5704.33 v1(6695.91,5824.33)
VBACK: C5.1 H2.56 U1.6 | length 1585.5
  Top Layer w9.92: C5.1@4331.26,6260.94 4371.69,6220.51 4371.69,6192 4401.69,6162 U1.6@4461.69,6162
  Inner1 w10: H2.56@3335.43,6690.94 3378.51,6734.02 3448.18,6734.02 3482.83,6768.67 3482.83,6798.67 3518.18,6834.02 3758.18,6834.02 3792.83,6799.38 3792.83,6769.38 3828.18,6734.02 3858.18,6734.02 3878.56,6713.64 3878.56,6683.64 4338.18,6224.02 v1(4368.18,6224.02)
VBAT: C30.2 J1.1 Q1.3 U5.5 | length 1583.8
  Top Layer w10: C30.2@3391.26,5450.94 v1(3441.26,5450.94) ; v1(3711.26,5280.94) 3746.26,5245.94 U5.5@3756.39,5245.94 ; Q1.3@4191.26,5830.94 4191.26,5800.94 v1(4201.26,5790.94)
  Inner2 w10: J1.1@3146.89,5315.15 3282.68,5450.94 v1(3441.26,5450.94) ; v1(3711.26,5280.94) 4065.2,5634.88 4065.2,5699.41 4156.73,5790.94 v1(4201.26,5790.94)
  Bottom Layer w10: v1(3441.26,5450.94) 3611.26,5280.94 v1(3711.26,5280.94)
VBUS: C27.1 D1.1 D3.1 D6.2 Q1.1 R7.1 R13.2 U5.4 U5.8 USB1.A4 USB1.A9 USB1.B4 USB1.B9 | length 4991.8
  Top Layer w10: USB1.A9@3296.96,6270.54 3295.74,6271.76 USB1.B4@3295.74,6283.44 ; USB1.B9@3296.97,6459.52 USB1.A4@3295.97,6470.33 ; USB1.A4@3296.97,6471.33 USB1.A4@3295.97,6470.33 ; D3.1@3393.24,5265.94 3413.24,5245.94 U5.4@3527.39,5245.94 3549.79,5268.34 v1(3572.52,5268.34) ; v1(3707.77,6183.6) 3695.59,6183.6 D1.1@3658.24,6220.94 3648.24,6220.94 3578.24,6290.94 3578.24,6293.44 ; D6.2@3755.89,6475.94 3695.89,6535.94 3588.24,6535.94 3578.24,6525.94 3578.24,6293.44 ; U5.8@3756.39,5395.94 3801.29,5440.85 3893.21,5440.85 C27.1@3928.57,5476.2 3937.52,5485.16 R13.2@3937.52,5570.94 3932.52,5575.94 v1(3932.52,5618.34) ; v1(4072.52,5868.34) Q1.1@4112.52,5868.34 ; R7.1@5582.52,5965.94 5587.85,5971.27 v1(5620.09,5971.27) ; USB1.B4@3295.74,6283.44 3568.24,6283.44 3578.24,6293.44 ; USB1.B4@3295.74,6283.44 3268.24,6283.44 3228.24,6323.44 3228.24,6418.14 3280.43,6470.33 USB1.A4@3295.97,6470.33
  Inner1 w10: v1(3707.77,6183.6) 4030.09,5861.27 ; v1(3932.52,5618.34) 4037.17,5722.99 4037.17,5832.99 4047.77,5843.6 ; v1(4060.09,5891.27) 4030.09,5861.27 ; v1(4072.52,5868.34) 4047.77,5843.6 ; 4030.09,5861.27 4047.77,5843.6
  Inner2 w10: v1(3572.52,5268.34) 3922.52,5618.34 v1(3932.52,5618.34) ; v1(4060.09,5891.27) 4110.09,5941.27 5010.09,5941.27 5150.09,6081.27 5240.09,6081.27 5275.45,6116.63 5275.45,6136.63 5360.09,6221.27 5380.09,6221.27 5415.45,6185.92 5425.45,6185.92 5490.09,6121.27 5490.09,6091.27 5525.45,6055.92 5535.45,6055.92 v1(5620.09,5971.27)
VCAP_1: C6.1 U1.71 | length 397.4
  Top Layer w9.92: C6.1@4982.52,5260.94 5021.69,5300.11 v1(5021.69,5310.74) ; v1(5211.69,5430.74) U1.71@5211.69,5490.74
  Inner2 w9.92: v1(5021.69,5310.74) 5031.69,5300.74 5121.69,5300.74 5211.69,5390.74 v1(5211.69,5430.74)
VCAP_2: C7.2 U1.106 | length 244
  Top Layer w9.92: U1.106@5312.09,6221.06 5362.09,6221.06 5382.09,6241.06 5382.09,6350.51 C7.2@5421.89,6390.31
VREF+: C25.2 C26.2 L1.2 U1.32 | length 943.5
  Top Layer w9.92: C26.2@4361.26,5540.94 4381.69,5561.37 4381.69,5590.35 4381.69,5610.19 4421.69,5650.19 U1.32@4461.69,5650.19
  Top Layer w10: L1.2@4014.93,5665.94 4072.02,5608.86 v1(4114.13,5608.86) ; v1(4351.69,5580.35) 4361.69,5590.35 4381.69,5590.35 ; C26.2@4361.26,5540.94 4371.26,5540.94 4459.41,5452.8 4459.41,5382.8 C25.2@4571.26,5270.94
  Inner1 w10: v1(4114.13,5608.86) 4142.64,5580.35 v1(4351.69,5580.35)
VSS: U1.16 U1.38 U1.51 U1.61 U1.83 U1.94 U1.107 U1.120 U1.130 | length 3045.7
  Top Layer w9.92: U1.16@4461.69,5965.15 4501.69,5965.15 4581.69,5885.15 4581.69,5635.15 4562.09,5615.55 4562.09,5579.52 ; U1.38@4562.09,5490.74 4562.09,5579.52 ; U1.51@4817.99,5490.74 4817.45,5491.29 4817.45,5544.17 ; U1.130@4817.99,6341.14 4817.99,6274.94 4836.33,6256.6 4866.33,6256.6 v1(4886.33,6276.6) ; U1.61@5014.84,5490.74 5014.84,5556.77 4999.2,5572.42 ; U1.120@5014.84,6341.14 5014.84,6293.63 5042.86,6265.61 5042.86,6240.07 ; v1(5026.33,6256.6) 5042.86,6240.07 ; v1(5069.2,5682.42) 5034.56,5647.77 5034.56,5607.77 4999.2,5572.42 ; U1.83@5312.09,5768.3 5173.31,5768.3 v1(5159.2,5782.42) 5149.2,5792.42 5149.2,5812.42 5184.56,5847.77 5184.56,5937.31 5203.85,5956.6 ; U1.94@5312.09,5984.84 5232.09,5984.84 5203.85,5956.6 ; U1.107@5312.09,6240.74 5197.99,6240.74 5153.85,6196.6 5113.85,6196.6 5093.85,6216.6 5046.33,6216.6 ; 4562.09,5579.52 4782.09,5579.52 4817.45,5544.17 ; 4817.45,5544.17 4847.45,5574.17 4997.45,5574.17 4999.2,5572.42 ; 5042.86,6215.61 5027.07,6199.83 5027.07,6133.38 5203.85,5956.6 ; 5042.86,6215.61 5043.85,6216.6 5046.33,6216.6 ; 5042.86,6215.61 5042.86,6240.07 ; 5042.86,6240.07 5046.33,6236.6 5046.33,6216.6
  Inner1 w9.92: v1(4886.33,6276.6) 4906.33,6256.6 4986.33,6256.6 4996.33,6266.6 5016.33,6266.6 v1(5026.33,6256.6) ; v1(5069.2,5682.42) 5069.2,5692.42 v1(5159.2,5782.42)
XCLK: JP1.13 R54.2 | length 1630.3
  Top Layer w10: R54.2@5506.26,6055.94 5521.2,6070.88 v1(5521.2,6095.78) ; v1(6631.2,6305.78) 6641.2,6295.78 JP1.13@6741.2,6295.78
  Inner1 w10: v1(5521.2,6095.78) 5555.85,6061.14 5775.85,6061.14 v1(5811.2,6025.78)
  Inner2 w10: v1(5811.2,6025.78) 5841.2,6055.78 6461.2,6055.78 6471.2,6065.78 6621.2,6065.78 6721.2,6165.78 6721.2,6225.78 6641.2,6305.78 v1(6631.2,6305.78)
pads on no net: D4.1 JP1.1 JP2.28 JP2.32 R6.1 S1.1 S1.4 S1.5 U4.4 USB1.A8 USB1.B8
copper on no net: | length 432.6
  Top Layer w10: 3393.24,5360.94 3534.66,5502.37 3654.66,5502.37 v1(3663.24,5510.94) ; v1(3713.24,5500.94) 3752.52,5500.94 3757.52,5495.94
  Bottom Layer w10: v1(3663.24,5510.94) 3703.24,5510.94 v1(3713.24,5500.94)

## Keep-outs
Multi-Layer:
  circle w10: c3110.63,6769.33 r59.06
  circle w10: c6838.98,6769.33 r59.06
  circle w10: c3115.63,5005.55 r59.06
  circle w10: c6838.98,5005.55 r59.06
  circle w10: c3115.63,3059.06 r59.06
  circle w10: c3115.63,4822.83 r59.06
  circle w10: c6838.98,4822.83 r59.06
  circle w10: c6838.98,3059.06 r59.06
  region: 4418.76,4907.13 4418.76,4915 3193.92,4915 3193.92,4907.13
  region: 5776.71,4907.13 5776.71,4915 4601.87,4915 4601.87,4907.13
  region: 6747.82,4907.13 6747.82,4915 5916.67,4915 5916.67,4907.13

## Silkscreen, mask and mechanical layers (free items; w line width, h text height)
Top Silkscreen Layer:
  text "GND" at 3256.89,6595.94 h45
  text "BOOT0" at 3357.48,6588.7 h45
  text "F6" at 3522.48,6588.7 h45
  text "F4" at 3610.88,6588.7 h45
  text "F2" at 3710.88,6588.7 h45
  text "F0" at 3820.88,6588.7 h45
  text "E6" at 3920.88,6588.7 h45
  text "E4" at 4020.88,6588.7 h45
  text "E2" at 4120.88,6588.7 h45
  text "E0" at 4220.88,6588.7 h45
  text "B8" at 4305.88,6588.7 h45
  text "B6" at 4405.88,6588.7 h45
  text "B4" at 4505.88,6588.7 h45
  text "G15" at 4605.88,6588.7 h45
  text "G13" at 4705.88,6588.7 h45
  text "G11" at 4805.88,6588.7 h45
  text "G9" at 4905.88,6588.7 h45
  text "D6" at 5005.88,6588.7 h45
  text "D4" at 5110.88,6588.7 h45
  text "D2" at 5210.88,6588.7 h45
  text "D0" at 5310.88,6588.7 h45
  text "C11" at 5410.88,6588.7 h45
  text "A15" at 5510.88,6588.7 h45
  text "A13" at 5610.88,6588.7 h45
  text "C9" at 5710.88,6588.7 h45
  text "C7" at 5810.88,6588.7 h45
  text "G8" at 5910.88,6588.7 h45
  text "G6" at 6010.88,6588.7 h45
  text "VBACK" at 3241.89,6555.94 h45
  text "RET" at 3505.88,6533.7 h45
  text "F5" at 3610.88,6533.7 h45
  text "F3" at 3710.88,6533.7 h45
  text "F1" at 3820.88,6533.7 h45
  text "C13" at 3920.88,6533.7 h45
  text "E5" at 4020.88,6533.7 h45
  text "E3" at 4120.88,6533.7 h45
  text "E1" at 4220.88,6533.7 h45
  text "B9" at 4305.88,6533.7 h45
  text "B7" at 4405.88,6533.7 h45
  text "B5" at 4505.88,6533.7 h45
  text "B3" at 4605.88,6533.7 h45
  text "G14" at 4705.88,6533.7 h45
  text "G12" at 4805.88,6533.7 h45
  text "G10" at 4905.88,6533.7 h45
  text "D7" at 5005.88,6533.7 h45
  text "D5" at 5110.88,6533.7 h45
  text "D3" at 5210.88,6533.7 h45
  text "D1" at 5310.88,6533.7 h45
  text "C12" at 5410.88,6533.7 h45
  text "C10" at 5510.88,6533.7 h45
  text "A14" at 5610.88,6533.7 h45
  text "A8" at 5710.88,6533.7 h45
  text "C8" at 5810.88,6533.7 h45
  text "C6" at 5910.88,6533.7 h45
  text "G7" at 6010.88,6533.7 h45
  text "3.3V" at 3376.89,6530.94 h45
  text "STM32F407ZGT6" at 4716.89,5970.94 h45
  text "+" at 3129.39,5465.99 h45 r270
  text "A2" at 3807.13,5187.21 h45
  text "A4" at 3907.13,5187.21 h45
  text "A6" at 4007.13,5187.21 h45
  text "C4" at 4107.13,5187.21 h45
  text "B0" at 4207.13,5187.21 h45
  text "B2" at 4307.13,5187.21 h45
  text "F12" at 4407.13,5187.21 h45
  text "F14" at 4507.13,5187.21 h45
  text "G0" at 4607.13,5187.21 h45
  text "E7" at 4702.13,5187.21 h45
  text "E9" at 4807.13,5187.21 h45
  text "E11" at 4907.13,5187.21 h45
  text "E13" at 5007.13,5187.21 h45
  text "E15" at 5107.13,5187.21 h45
  text "B11" at 5207.13,5187.21 h45
  text "B13" at 5307.13,5187.21 h45
  text "B15" at 5407.13,5187.21 h45
  text "D9" at 5507.13,5187.21 h45
  text "D11" at 5607.13,5187.21 h45
  text "D13" at 5707.13,5187.21 h45
  text "D15" at 5807.13,5187.21 h45
  text "G3" at 5907.13,5187.21 h45
  text "G5" at 6002.13,5187.21 h45
  text "C0" at 3507.13,5182.21 h45
  text "C2" at 3602.13,5182.21 h45
  text "A0" at 3702.13,5182.21 h45
  text "F9" at 3397.13,5179.71 h45
  text "GND" at 3277.48,5177.21 h45
  text "A1" at 3807.13,5132.21 h45
  text "A3" at 3907.13,5132.21 h45
  text "A5" at 4007.13,5132.21 h45
  text "A7" at 4107.13,5132.21 h45
  text "C5" at 4207.13,5132.21 h45
  text "B1" at 4307.13,5132.21 h45
  text "F11" at 4407.13,5132.21 h45
  text "F13" at 4507.13,5132.21 h45
  text "F15" at 4607.13,5132.21 h45
  text "G1" at 4702.13,5132.21 h45
  text "E8" at 4807.13,5132.21 h45
  text "E10" at 4907.13,5132.21 h45
  text "E12" at 5007.13,5132.21 h45
  text "E14" at 5107.13,5132.21 h45
  text "B10" at 5207.13,5132.21 h45
  text "B12" at 5307.13,5132.21 h45
  text "B14" at 5407.13,5132.21 h45
  text "D8" at 5507.13,5132.21 h45
  text "D10" at 5607.13,5132.21 h45
  text "D12" at 5707.13,5132.21 h45
  text "D14" at 5807.13,5132.21 h45
  text "G2" at 5907.13,5132.21 h45
  text "G4" at 6002.13,5132.21 h45
  text "F7" at 3292.48,5127.21 h45
  text "F8" at 3397.48,5127.21 h45
  text "F10" at 3507.13,5127.21 h45
  text "C1" at 3602.13,5127.21 h45
  text "C3" at 3702.13,5127.21 h45
  text "-" at 3141.89,5065.94 h45
Mechanical Layer:
  circle w1: c3110.63,6769.33 r59.06
  circle w1: c6838.98,6769.33 r59.06
  circle w1: c3115.63,5005.55 r59.06
  circle w1: c6838.98,5005.55 r59.06
  circle w1: c3115.63,3059.06 r59.06
  circle w1: c3115.63,4822.83 r59.06
  circle w1: c6838.98,4822.83 r59.06
  circle w1: c6838.98,3059.06 r59.06
  lines w1: 3193.92,4907.13 3193.92,4915 4418.76,4915 4418.76,4907.13 3193.92,4907.13 ; 4601.87,4907.13 4601.87,4915 5776.71,4915 5776.71,4907.13 4601.87,4907.13 ; 5916.67,4907.13 5916.67,4915 6747.82,4915 6747.82,4907.13 5916.67,4907.13